# EAGLE board Wiring Components (EAGLE 9.7.0)

Size 160.03 x 67.8 mm. Coordinates in mm from the lower left corner, seen from the top.
Outline: 0,0 160.03,0 160.03,67.8 0,67.8 0,0
Copper layers (1*16): Top 0.035mm / dielectric 1.5mm / Bottom 0.035mm
Design rules "default": minimum track width 6mil, minimum drill 0.35mm, track to track 6mil, track to pad 6mil, pad to pad 6mil, via to via 6mil, smd to smd 6mil, copper to edge 40mil, drill to drill 6mil, minimum pad ring 10mil, minimum via ring 8mil, stop-mask expansion 4mil, vias tented up to drill 0mil, thermal gap 10mil

## Footprints (pad centres in the part's own frame; a part is rotated, then mirrored left to right if it is on the bottom)
HC-SR04 = drill 1.016 long: 1 -3.81,0; 2 -1.27,0; 3 1.27,0; 4 3.81,0
SG90 = drill 1.016 long: 1 -2.54,0; 2 0,0; 3 2.54,0
ARDUINO-UNO-R3-SHIELD = drill 1.016 pad 1.88: 3.3V 24.13,-2.54; 5V 24.13,0; A0 24.13,12.7; A1 24.13,15.24; A2 24.13,17.78; A3 24.13,20.32; A4 24.13,22.86; A5 24.13,25.4; AREF -24.13,-13.97; D2 -24.13,20.32; D3 -24.13,17.78; D4 -24.13,15.24; D5 -24.13,12.7; D6 -24.13,10.16; D7 -24.13,7.62; D8 -24.13,3.81; D9 -24.13,1.27; D10 -24.13,-1.27; D11 -24.13,-3.81; D12 -24.13,-6.35; D13 -24.13,-8.89; GND@0 24.13,2.54; GND@1 24.13,5.08; GND@2 -24.13,-11.43; IOREF 24.13,-7.62; NC 24.13,-10.16; RES 24.13,-5.08; RX -24.13,25.4; SCL -24.13,-19.05; SDA -24.13,-16.51; TX -24.13,22.86; VIN 24.13,7.62

## Placement (x,y rotation side)
DIST1  DISTANCE-SENSOR-4PINHC-SR04  [HC-SR04]  152.41,27.21 270 top
SERVOSERVO  SERVOSG90  [SG90]  121.77,6.99 0 top
UARDUINO_UNO  ARDUINO-UNO-R3-SHIELD  [ARDUINO-UNO-R3-SHIELD]  47.88,37.95 270 top

## Library data of the parts
DIST1 SERVOSERVO UARDUINO_UNO = Tinkercad

## Nets
UARDUINO_UNO_5V: DIST1.1 SERVOSERVO.1 UARDUINO_UNO.5V
UARDUINO_UNO_D3: DIST1.3 UARDUINO_UNO.D3
UARDUINO_UNO_D5: DIST1.2 UARDUINO_UNO.D5
UARDUINO_UNO_D10: SERVOSERVO.3 UARDUINO_UNO.D10
UARDUINO_UNO_GND: DIST1.4 SERVOSERVO.2 UARDUINO_UNO.GND@0 UARDUINO_UNO.GND@1 UARDUINO_UNO.GND@2

## Tracks (layer width: path | path; a pad name or v marks a point on that pad's centre or on a via)
UARDUINO_UNO_5V  (2 unrouted)
UARDUINO_UNO_D3  (1 unrouted)
UARDUINO_UNO_D5  (1 unrouted)
UARDUINO_UNO_D10  (1 unrouted)
UARDUINO_UNO_GND  (4 unrouted)